# Altium PCB Badge_Cig_PCB.PcbDoc
Units mil, origin at the board's own origin, x right, y up, seen from the top; angles counter-clockwise.
Board outline 1353.72 x 1848.57 mil, 2 copper layers (Top Layer, Bottom Layer), stack 25.4 mil thick; 3 components, 3 nets, 9 pads, 0 vias.
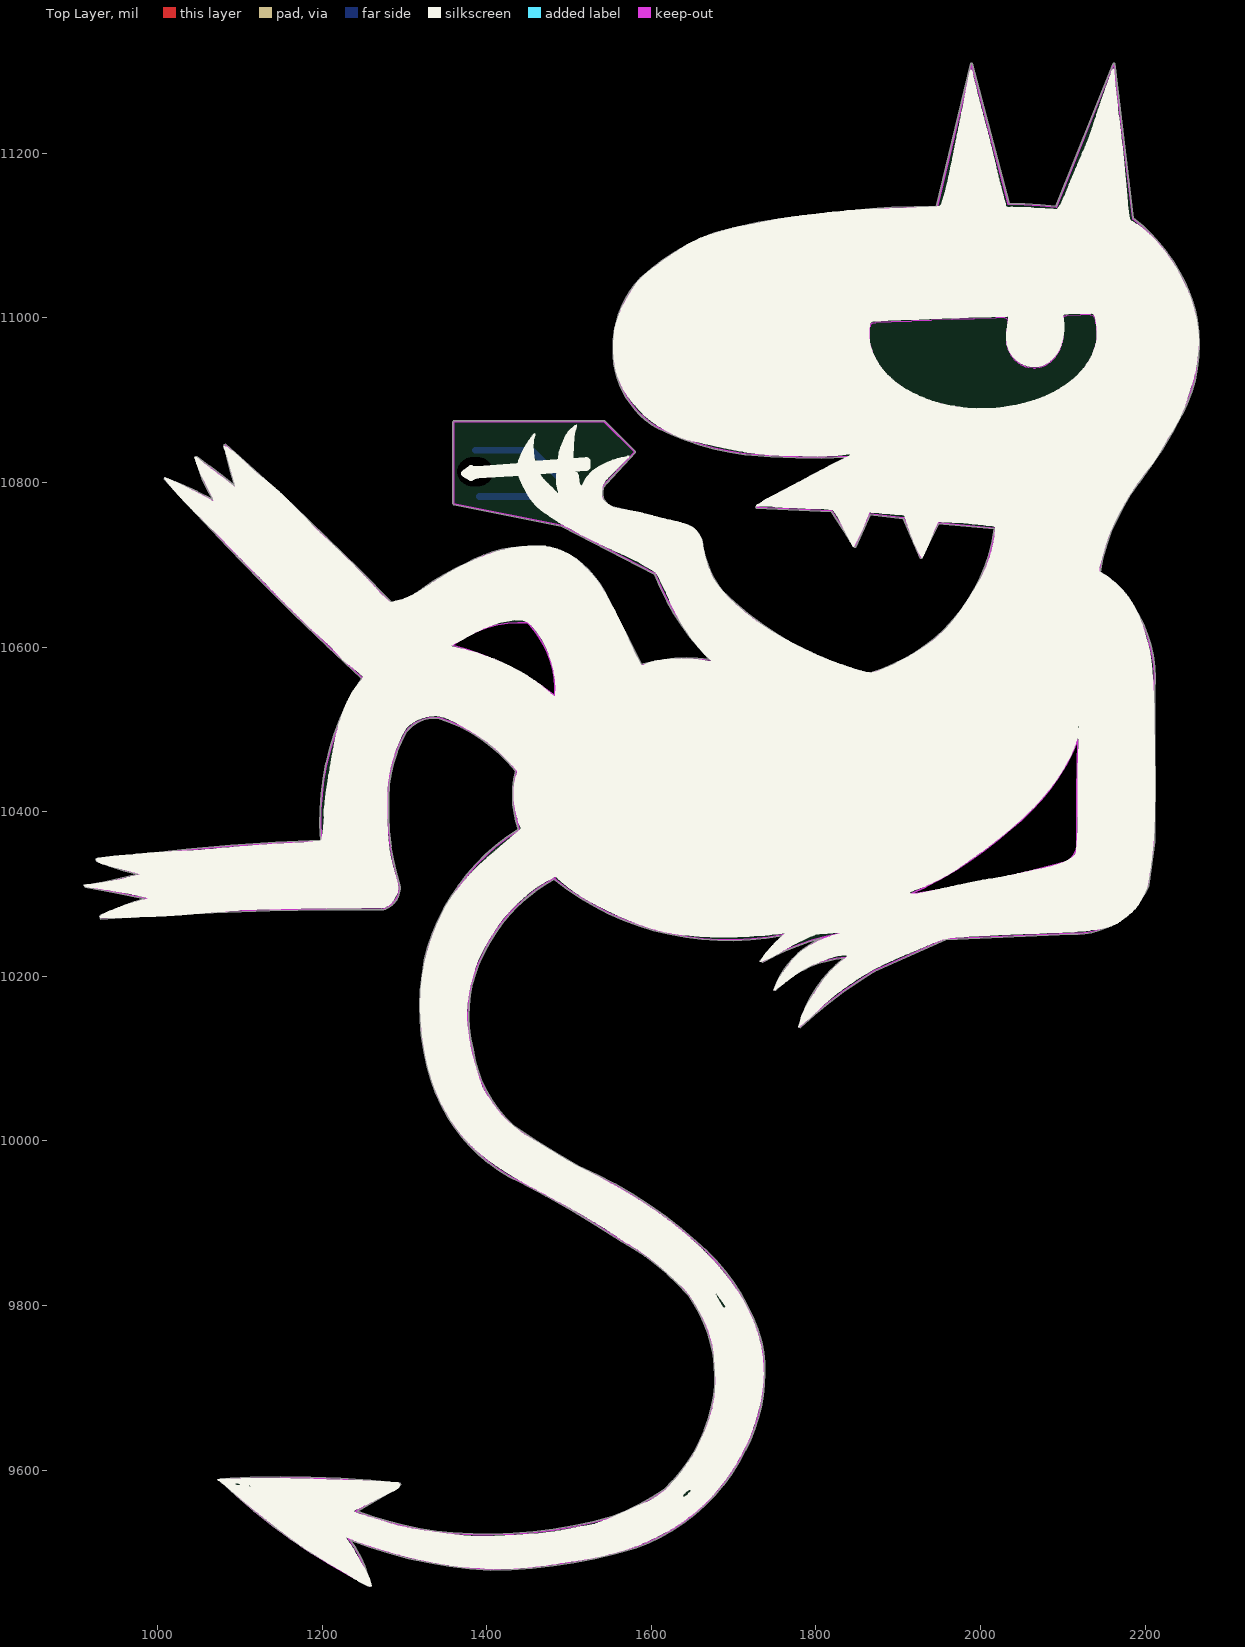
[diagram p0: Top Layer view]
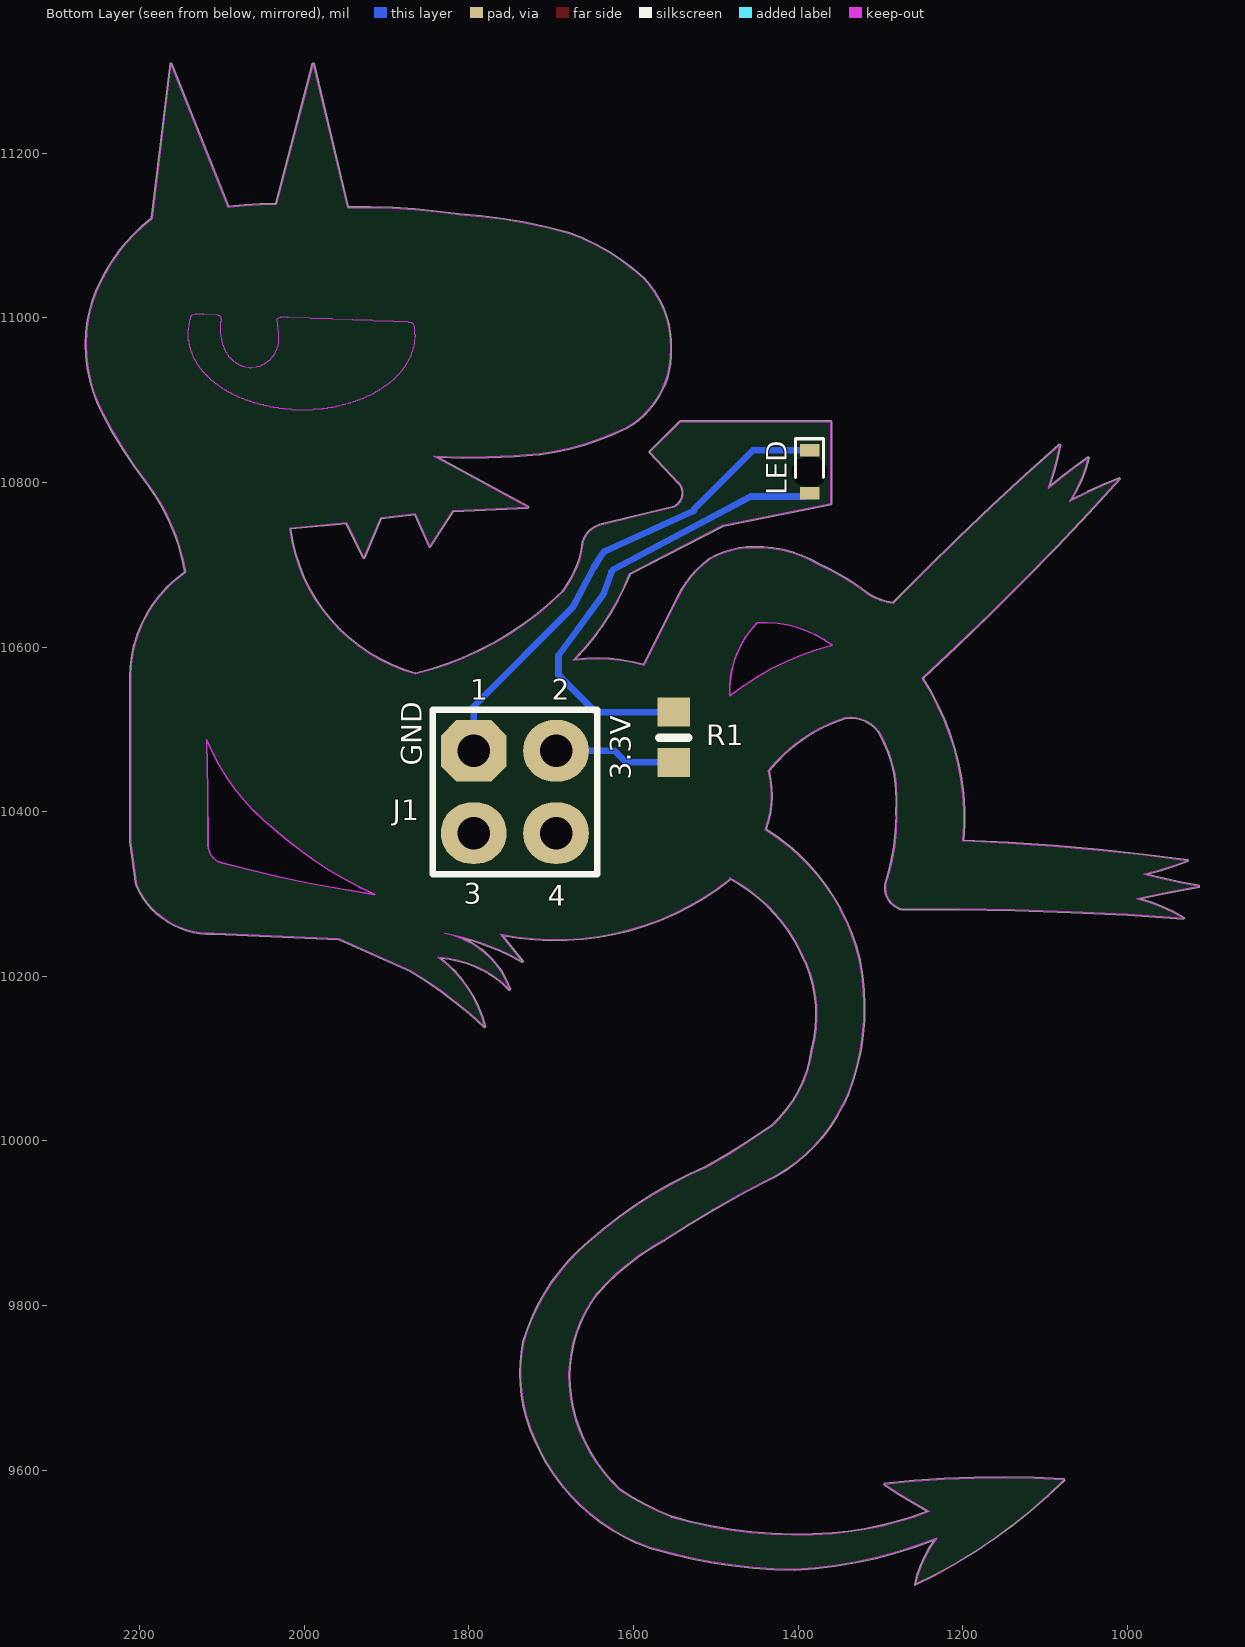
[diagram p1: Bottom Layer view, seen from below]
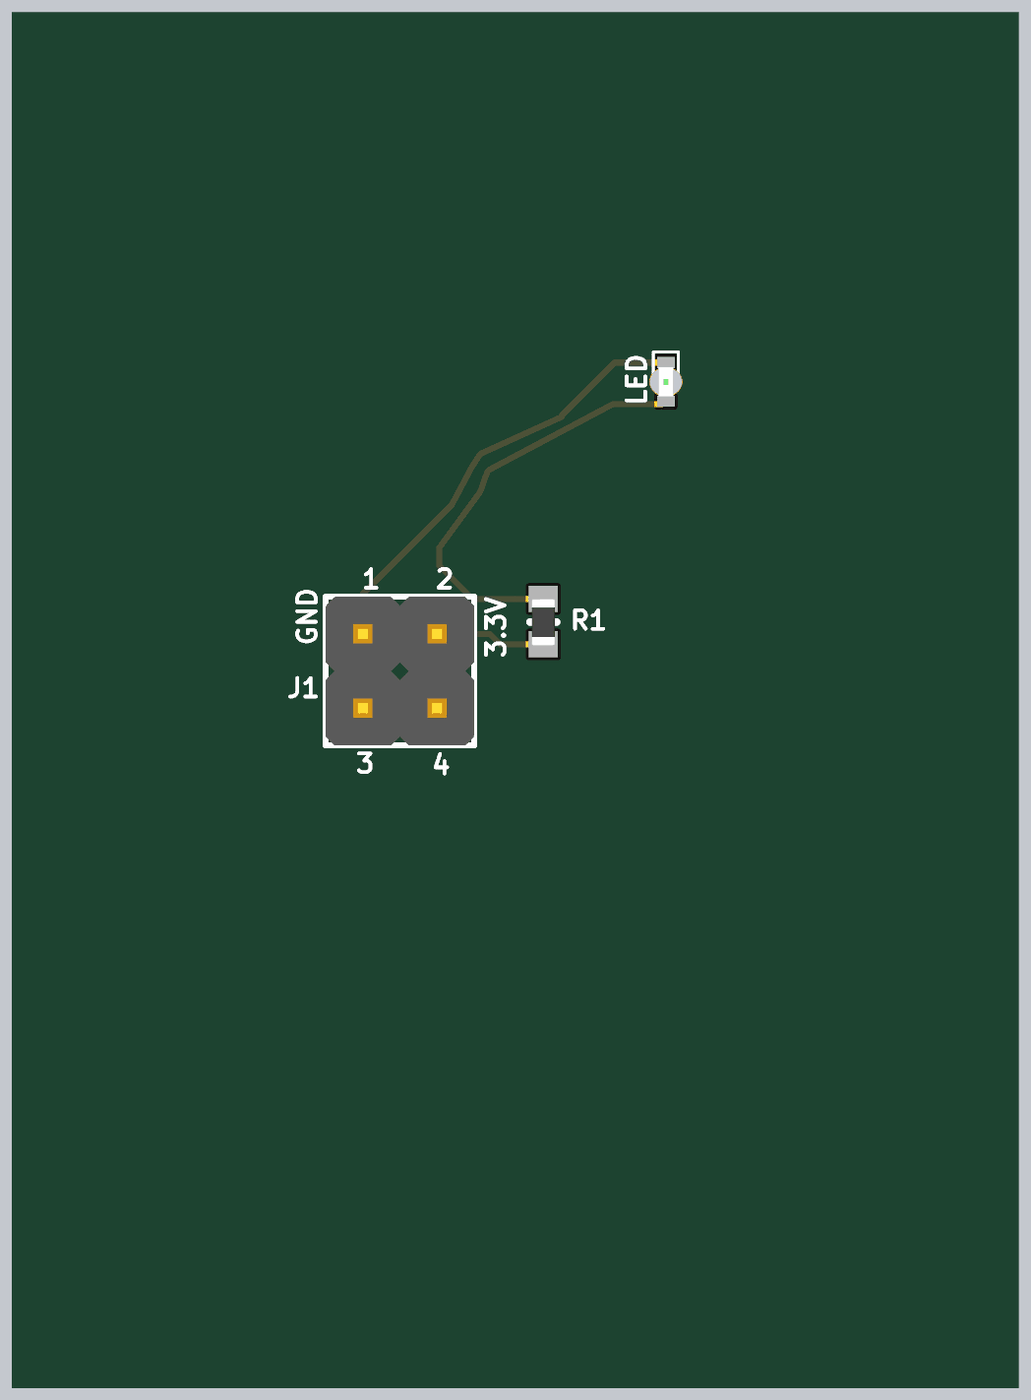
[diagram p2: 3D render of the assembled board from below, using the file's embedded part models]

## Layer stack, top to bottom
Top Solder: solder mask 0.4, Solder Resist, Dk 3.5
Top Layer: signal copper 1.4
Dielectric 1: core 10, FR-4, Dk 4.2
Dielectric2: dielectric 12.6, FR-4, Dk 4.8
Bottom Layer: signal copper 1.4
Solder Side: solder mask 0.4, Solder Resist, Dk 3.5

## Board outline
1258.47,9460.8 cw(c1534.33,10052.49) 1075.84,9587.76 1076.49,9589.49 cw(c1154.24,8327.5) 1295.11,9584.01 1295.37,9582.04 cw(c935.55,10112.99) 1243.13,9550.17 ccw(c1390.4,9932.48) 1358.39,9524.03 1358.4,9524.03 ccw(c1401.56,10068.95) 1553.08,9543.75 1553.54,9544.11 ccw(c1433.75,9849.44) 1615.84,9576.65 ccw(c1483.03,9719.13) 1675.76,9690.95 ccw(c1509.28,9713.37) 1677.27,9713.36 ccw(c1509.34,9713.36) 1643.93,9813.79 ccw(c1422.51,9619) 1562.79,9878.4 1562.7,9878.46 ccw(c886.03,8857.78) 1440.78,9949.53 cw(c1527.67,10134.59) 1338.43,10057.21 1338.1,10057.66 cw(c1610.78,10161.99) 1324.42,10218.92 1324.27,10219.72 cw(c1574.88,10160.25) 1438.54,10378.77 cw(c1554.1,10419.98) 1435.01,10449.44 ccw(c1284.61,10329.57) 1342.76,10512.89 ccw(c1335.91,10471.53) 1302.44,10496.79 ccw(c1443.84,10415.41) 1281.74,10433.78 ccw(c1692.21,10406.46) 1283.75,10357.48 ccw(c1669.01,10423.53) 1294.64,10311.15 1294.87,10308.13 cw(c1266.27,10308.13) 1274.52,10280.75 1273.24,10280.65 ccw(c1233.88,6211.38) 931.09,10269.56 930.47,10271.44 cw(c1038.67,10091.79) 983.98,10294.25 cw(c4842.23,29859.62) 912.29,10308.52 912.32,10310.52 ccw(c792.21,11023.69) 975.58,10324.11 cw(c1063.8,10693.22) 926,10339.61 926.25,10341.57 cw(c1301.49,7643.51) 1198.41,10365.58 cw(c1511.38,10391.03) 1247.89,10561.82 cw(c3843.28,13366.2) 1008.25,10804.32 1009.37,10805.95 cw(c803.48,10276.81) 1067.12,10779.67 cw(c1215.1,10870.7) 1046.17,10830.11 1047.73,10831.18 cw(c679.6,10299.03) 1093.88,10796.1 cw(c1452.46,10915.51) 1081,10845.81 1082.67,10846.76 cw(c-1334.73,8108.31) 1284.29,10654.61 ccw(c1277.49,10722.01) 1322.26,10671.17 1322.35,10671.25 cw(c1503.87,10418.2) 1375.4,10701.89 cw(c1450.64,10571.77) 1453.37,10722.05 cw(c1454.05,10612.68) 1507.27,10708.23 1507.39,10708.15 cw(c1432.45,10605.54) 1547.3,10659.89 1587.78,10579.32 cw(c1645.08,10365.88) 1670.48,10585.42 cw(c1890.45,10800.28) 1604.05,10688.35 1490.59,10746.89 1359.81,10772.96 1358.98,10773.95 1358.98,10874 1360,10875.01 1543,10875.01 1543.71,10874.72 1580.72,10837.71 1580.74,10836.31 1545.3,10798.52 1544.84,10798.24 ccw(c1558.6,10787.09) 1550.51,10771.35 1641.2,10749.01 1641.64,10748.9 cw(c1632.69,10719.83) 1661.88,10728.36 1661.92,10728.17 ccw(c1782.7,10742.38) 1686.25,10668.3 ccw(c1954.29,10938.56) 1864.91,10568.57 ccw(c1807.91,10771.15) 2016.53,10743.54 1948.95,10749.8 1928.36,10707.87 1926.51,10707.92 1906.26,10756.19 1865.8,10760.81 1848.37,10721.59 1846.58,10721.45 1818.72,10764.58 1727.57,10768.89 1727.13,10770.8 1755.75,10786.33 1812.99,10817.39 1837.18,10830.53 cw(c1799.67,11692.65) 1714.23,10833.95 1713.5,10833.78 cw(c1760.73,11180.24) 1608.22,10865.58 1608.16,10865.61 cw(c1661.15,10959.08) 1553.76,10962.61 cw(c1674.64,10965.41) 1586.82,11048.51 1586.86,11048.56 cw(c1767.35,10853.44) 1677.05,11103.43 1677.12,11103.45 cw(c1852.4,10482.59) 1811.57,11126.43 cw(c1933.72,10283.7) 1946.28,11135.14 1988.01,11309.23 1989.98,11309.25 2034.78,11138.95 cw(c2034.38,10666.49) 2091.4,11135.49 2161.06,11309.38 2163.01,11309.12 2185.87,11121.18 cw(c2053.18,10950.54) 2242.27,11055.28 cw(c2076.86,10961.33) 2263.61,10997.5 2263.62,10997.47 cw(c2082.24,10967.92) 2266.01,10967.92 cw(c2082.24,10967.92) 2245.1,10882.8 2244.69,10882.38 cw(c1769.96,11124.82) 2192.91,10800.38 ccw(c2389.12,10649.68) 2145.21,10691.15 2145.74,10690.97 cw(c2055.03,10562.7) 2212.13,10562.7 cw(c2055.11,10562.7) 2211.77,10552.02 2211.87,10363.6 2211.86,10363.45 2204.43,10310.64 2204.36,10310.37 cw(c2113.68,10349.72) 2109.64,10250.95 1957.66,10244.51 1871.33,10205.86 ccw(c2133.4,9765.41) 1781.24,10137.77 1779.55,10138.76 cw(c1928.34,10100.96) 1833.89,10221.98 ccw(c1845.33,10089.31) 1750.8,10183.1 1749.12,10184.16 cw(c1850.31,10148.16) 1806.73,10246.32 ccw(c1883.86,9957.2) 1735.16,10216.87 1733.87,10218.39 1758.91,10249.47 cw(c1694.32,10584.46) 1481.7,10317.66 ccw(c1577.28,10142.12) 1397.13,10228.7 1397.1,10228.64 ccw(c1540.61,10152.57) 1383.69,10110.63 1383.72,10110.49 ccw(c1534.93,10132.19) 1432.12,10019.2 ccw(c1967.87,10783.2) 1511.85,9969.09 cw(c1301.28,9480.68) 1654.93,9877.95 cw(c1492.49,9685.32) 1734.38,9755.91 1734.4,9755.82 cw(c1539.91,9718.1) 1738.02,9718.1 cw(c1539.91,9718.09) 1714.54,9624.55 1714.46,9624.27 cw(c1502.91,9727.38) 1580.47,9505.19 1580.42,9505.18 cw(c1394.45,10131.88) 1404.22,9478.24 1404.15,9478.24 cw(c1432.53,10017.59) 1234.56,9515.09 cw(c1116.1,9430.51)
cut-out: 1358.42,10602.37 cw(c1440.94,10491.63) 1449.71,10629.46 cw(c1364.29,10546.92) 1482.91,10540.82 ccw(c1274.73,10276.41)
cut-out: 1914.63,10299.49 ccw(c1666.83,11962.58) 2103.85,10338.92 ccw(c2092.64,10360.52) 2116.91,10362.2 cw(c8344.68,10359.75) 2118.21,10487.08 cw(c1876.23,10584.96) 2036.37,10378.83 cw(c1710.88,10745.25)

## Design rules (kind name [scope] priority, off if disabled: settings)
Clearance [All] p1: gap=7.87 ignorepadtopadclearanceinfootprint=FALSE except(0: Arc-Hole Track-Hole SMDPad-Hole THPad-Hole Via-Hole Fill-Hole Poly-Hole Region-Hole Text-Hole; 15: Arc-Fill Arc-Poly Arc-Region Track-Fill Track-Poly Track-Region SMDPad-Fill SMDPad-Poly SMDPad-Region THPad-Fill THPad-Poly THPad-Region Via-Fill Via-Poly Via-Region Fill-Fill Fill-Poly Fill-Region Poly-Poly Poly-Region Region-Region)
MinimumSolderMaskSliver [All] p1: minsoldermaskwidth=3
PolygonConnect [All] p1: connectstyle=Direct reliefconductorwidth=10 reliefentries=4 polygonreliefangle="90 Angle" airgapwidth=10
RoomDefinition Badge_Cig [InComponentClass('Badge_Cig')] p1: confinementstyle=ConfineIn formatcopy=TRUE lockcomponents=FALSE outline 0,0 2000,0 2000,1000 0,1000
RoutingVias [All] p1: holewidth=28 width=50 viastyle="Through Hole" minholewidth=28 minwidth=50 maxholewidth=28 maxwidth=50
SilkToSilkClearance [All] p1: silktosilkclearance=4
SilkToSolderMaskClearance [IsPad] p1: minsilkscreentomaskgap=4 clearancetoexposedcopper=TRUE
SolderMaskExpansion [All] p1: expansion=4 istentingtop=FALSE
Width [All] p1: maxlimit=300 minlimit=7 preferedwidth=8 minimp=50.000000 maximp=50.000000 favimp=50.000000
27 further rules are at their usual default settings.

## Components (designator, comment, footprint, x,y, rotation, side; value= is the part's Value field where it differs from the comment)
J1 "HDR2X2" HDR2X2_AUT 1794,10474 r270 bottom
LED "XL-1005UOC" 150040GS73240 1386,10813 r270 bottom
R1 "Resistor 0603" Res_0603 1471,10533 r180 bottom

## Footprints (in the part's own frame and the unit in brackets; to place one, negate y for a bottom-side part, rotate by r counter-clockwise, add the part's x,y. Pads: shape width x height; smd on the part's side, far side on the other; paste and mask are expansions set on the pad)
150040GS73240 [mil]
  rect 15x23.62 smd: 1(-26,0) 2(26,0)
  round 0 hole 35.43 slot 43.31 at 90 deg: 7(0,0)
  silkscreen extent -40,-17 7,17, body extent -20,-10 20,10, height 20
HDR2X2_AUT [mil] "Connector, Header, 2x2 Position, Pitch 2.54mm"
  oct 75x80 hole 39.37: 1(0,0)
  oval 75x80 hole 39.37: 2(0,100) 3(100,0) 4(100,100)
  silkscreen extent -50,-50 150,150, body extent -50,-50 150,150, height 398
Res_0603 [mil]
  rect 39.37x35 smd: 1(-80,-73) 2(-80,-12)
  silkscreen extent -98,-43 -62,-43, body extent -96,-75 -64,-12, height 35

## Part data
J1: "Header, 2-Pin, Dual row, 2.54mm Pitch, Straight", Supplier Part Number 1=2356130, Supplier 1=Farnell
LED: library part 150040GS73240, "LED", Manufacturer_Name="Wurth Elektronik", Mouser Part Number=710-150040GS73240, Datasheet Link=https://componentsearchengine.com/Datasheets/2/150040GS73240.pdf, Height=0.5mm, Manufacturer_Part_Number=150040GS73240, Mouser Price/Stock=https://www.mouser.co.uk/ProductDetail/Wurth-Elektronik/150040GS73240?qs=fAHHVMwC%252Bbgmx0FZHKuCJg%3D%3D
R1: library part "Resistor 1206", "Resistor, SMD, 1206"

## Nets (pads, with @x,y where several pads share a name; then routed paths per layer and width w, separated by ;. In a path a pad name is that pad's centre, name@x,y a point inside that pad or via, vN(x,y) a via of type N, cw(c..) or ccw(c..) an arc to the next point about the centre after c; other vN are vias at no path point)
GND: J1.1 LED.1 | length 593.8
  Bottom Layer w8: LED.1 1455,10839 1526,10768 1526,10766 1633.82,10716.99 ; 1633.86,10716.97 cw(c1630.51,10709.71) 1637.28,10713.98 1647.84,10697.26 cw(c1641.07,10692.98) 1648.14,10696.73 1674,10648 1794,10528 J1.1
NetJ1_2: J1.2 R1.1 | length 148.8
  Bottom Layer w8: R1.1 1609,10460 1623,10474 J1.2
NetLED_2: LED.2 R1.2 | length 562.7
  Bottom Layer w8: LED.2@1391.08,10783 1455.46,10783 1457.45,10783 1624.08,10694.56 1625.76,10692.88 cw(c1619.17,10688.35) 1626.7,10691.04 1626.81,10690.74 1635.62,10666.06 ccw(c1643.14,10668.79) 1636.67,10664.09 ; R1.2 1646,10521 1691,10566 1691,10590 1636.69,10664.06
pads on no net: J1.3 J1.4 LED.7

## Keep-outs
Keep-Out Layer:
  region: 510 vertices and 1 holes, not listed, extent 1864.5,10888.57 2141.54,11004.44
  lines w2: 1257.69,9459.59 ccw(c1116.1,9430.51) 1231.66,9517.33 ccw(c1432.53,10017.59) 1404.21,9479.26 ccw(c1394.45,10131.89) 1580.13,9506.15 ccw(c1502.91,9727.38) 1713.54,9624.72 ; 1257.88,9459.98 cw(c1537.43,10046.64) 1076.56,9588.47 cw(c1154.24,8327.5) 1295,9583 ; 1273.69,10281.56 ccw(c1266.27,10308.13) 1293.74,10310.68 ; 1274.07,10281.66 ccw(c1233.88,6211.39) 931,10270.57 cw(c1038.67,10091.79) 988.55,10294.38 cw(c4840.01,29848.58) 912.49,10309.52 ccw(c792.2,11023.71) 979.77,10324.17 cw(c1063.81,10693.22) 926.37,10340.56 cw(c1301.49,7643.44) 1199.51,10364.61 cw(c1511.38,10391.03) 1249.2,10561.98 cw(c3843.26,13366.18) 1009,10805 cw(c803.46,10276.76) 1070,10777 cw(c1215.1,10870.7) 1047.16,10830.35 cw(c679.57,10298.99) 1096,10793 cw(c1452.45,10915.51) 1082,10846 cw(c-1334.74,8108.31) 1283.91,10653.56 ccw(c1277.49,10722.01) 1322.95,10670.43 cw(c1503.87,10418.2) 1375.87,10700.98 cw(c1450.64,10571.77) 1453.37,10721.03 cw(c1454.05,10612.68) 1506.77,10707.35 cw(c1432.45,10605.54) 1546.39,10659.44 1586.97,10578.66 ; 1293.83,10310.29 cw(c1669.01,10423.53) 1282.75,10357.33 cw(c1692.21,10406.46) 1280.72,10433.87 cw(c1443.84,10415.41) 1301.59,10497.35 cw(c1335.91,10471.53) 1343,10513.88 cw(c1284.61,10329.57) 1436.11,10449.68 ccw(c1554.1,10419.98) 1439.78,10378.35 ccw(c1574.88,10160.25) 1325.26,10219.48 ; 1294.8,9582.88 cw(c935.54,10113.01) 1240.72,9550.01 ccw(c1390.4,9932.48) 1358.32,9523.02 ccw(c1401.56,10068.95) 1554.39,9543.07 ; 1325.6,10219.63 ccw(c1610.78,10161.99) 1339.04,10058.02 ; 1339.24,10057.92 ccw(c1527.67,10134.59) 1441.22,9950.44 cw(c886.01,8857.75) 1563.26,9879.3 cw(c1422.51,9619) 1644.72,9814.43 cw(c1509.34,9713.36) 1676.77,9690.8 cw(c1483.03,9719.13) 1616.47,9575.85 cw(c1433.75,9849.44) 1553.91,9543.17 ; 1482.24,10318.53 ccw(c1694.32,10584.46) 1761.45,10251.01 1734.65,10217.75 cw(c1883.86,9957.2) 1829.31,10252.45 ccw(c1850.31,10148.16) 1750.08,10183.82 cw(c1845.33,10089.31) 1837.22,10223.24 ccw(c1928.34,10100.97) 1780.54,10138.51 cw(c2133.4,9765.41) 1870.86,10206.76 1957.43,10245.51 2109.64,10251.97 ccw(c2113.68,10349.72) 2203.43,10310.77 2210.85,10363.6 2210.75,10552.05 ccw(c2055.03,10562.7) 2145.16,10690.14 ; 1483.06,10319.54 ccw(c1577.28,10142.12) 1396.21,10229.12 ccw(c1540.61,10152.57) 1382.71,10110.36 ccw(c1534.93,10132.19) 1431.49,10018.4 ccw(c1967.86,10783.17) 1511.4,9968.18 cw(c1301.28,9480.67) 1654.26,9877.18 cw(c1492.49,9685.32) 1733.4,9755.63 cw(c1539.91,9718.1) 1713.64,9625.01 ; 1544.56,10799.21 1580,10837 1543,10874 1360,10874 1360,10773.95 1490.93,10747.86 1604.86,10689.08 ccw(c1890.45,10800.28) 1673.25,10584.05 ccw(c1645.08,10365.88) 1587.07,10578.08 ; 1545.96,10800.9 ccw(c1558.6,10787.09) 1550.15,10770.39 1640.96,10748.02 ; 1641.34,10747.93 cw(c1632.69,10719.83) 1660.91,10728.07 ccw(c1782.7,10742.38) 1685.49,10667.63 ccw(c1954.28,10938.56) 1864.93,10567.52 ccw(c1807.9,10771.15) 2017.67,10744.46 1948.94,10750.82 ; 1713.64,10834.78 cw(c1760.73,11180.23) 1608.66,10866.5 cw(c1661.15,10959.08) 1554.78,10962.6 cw(c1674.64,10965.41) 1587.55,11047.82 cw(c1767.35,10853.44) 1677.39,11102.47 cw(c1852.41,10482.58) 1811.67,11125.42 cw(c1933.72,10283.69) 1947.08,11134.11 1989,11309 2034,11137.93 cw(c2034.38,10666.45) 2092.05,11134.39 2162,11309 2184.91,11120.64 cw(c2053.18,10950.54) 2241.38,11054.78 cw(c2076.85,10961.33) 2262.62,10997.31 cw(c2082.24,10967.92) 2244.2,10883.27 ; 1714.22,10834.97 ccw(c1799.67,11692.67) 1842.52,10831.79 ; 1842.09,10832.03 1813.47,10816.5 1756.23,10785.44 1727.62,10769.91 1819.29,10765.57 1847.44,10722 1865.17,10761.91 1906.96,10757.13 1927.45,10708.31 1948.27,10750.72 ; 2144.19,10691.2 cw(c2389.12,10649.68) 2192.1,10800.99 ccw(c1769.95,11124.83) 2244.3,10883.85 ; 1358.42,10602.37 cw(c1440.94,10491.63) 1449.71,10629.46 cw(c1364.29,10546.92) 1482.91,10540.82 ccw(c1274.73,10276.41) 1358.42,10602.37 ; 1914.63,10299.49 ccw(c1710.88,10745.25) 2036.37,10378.83 ccw(c1876.23,10584.96) 2118.21,10487.08 ccw(c8344.3,10359.76) 2116.91,10362.2 cw(c2092.64,10360.52) 2103.85,10338.92 cw(c1666.83,11962.58) 1914.63,10299.49

## Silkscreen, mask and mechanical layers (free items; w line width, h text height)
Top Overlay:
  drawing of 12 lines, arcs and shapes, not listed
Bottom Overlay:
  text "GND" at 1857,10456 h25 r270
  text "3.3V" at 1603,10439 h25 r270

## Text inside footprints (layer, text, board x,y; h text height)
J1: Bottom Overlay "1" at 1798,10536 h25; Bottom Overlay "2" at 1699,10536 h25; Bottom Overlay "4" at 1704,10286 h25; Bottom Overlay "3" at 1806,10288 h25